# EAGLE board headstage-mech-test (EAGLE 6.5.0)

Size 39.62 x 39.62 mm. Coordinates in mm from the lower left corner, seen from the top.
Outline: circle at 19.81,19.81 radius 19.81
Copper layers (1*16): Top 0.0356mm / dielectric 1.5011mm / Bottom 0.0356mm
Design rules "ohs-park-2-layer": minimum track width 6mil, minimum drill 13mil, track to track 6mil, track to pad 6mil, pad to pad 6mil, via to via 6mil, smd to smd 6mil, copper to edge 15mil, drill to drill 6mil, minimum pad ring 7mil, minimum via ring 7mil, stop-mask expansion 4mil, vias tented up to drill 100mil, thermal gap 10mil
Net classes: 1 thick: width 0.102 mm
Holes 1.27 mm at 10.31,28.7 28.7,29.31 29.31,10.92 10.92,10.31

## Footprints (pad centres in the part's own frame; a part is rotated, then mirrored left to right if it is on the bottom)
DF40-70REC = smd 0.2 x 1.14: 1 -6.8,1.17; 2 -6.4,1.17; 3 -6,1.17; 4 -5.6,1.17; 5 -5.2,1.17; 6 -4.8,1.17; 7 -4.4,1.17; 8 -4,1.17; 9 -3.6,1.17; 10 -3.2,1.17; 11 -2.8,1.17; 12 -2.4,1.17; 13 -2,1.17; 14 -1.6,1.17; 15 -1.2,1.17; 16 -0.8,1.17; 17 -0.4,1.17; 18 0,1.17; 19 0.4,1.17; 20 0.8,1.17; 21 1.2,1.17; 22 1.6,1.17; 23 2,1.17; 24 2.4,1.17; 25 2.8,1.17; 26 3.2,1.17; 27 3.6,1.17; 28 4,1.17; 29 4.4,1.17; 30 4.8,1.17; 31 5.2,1.17; 32 5.6,1.17; 33 6,1.17; 34 6.4,1.17; 35 6.8,1.17; 36 6.8,-1.17; 37 6.4,-1.17; 38 6,-1.17; 39 5.6,-1.17; 40 5.2,-1.17; 41 4.8,-1.17; 42 4.4,-1.17; 43 4,-1.17; 44 3.6,-1.17; 45 3.2,-1.17; 46 2.8,-1.17; 47 2.4,-1.17; 48 2,-1.17; 49 1.6,-1.17; 50 1.2,-1.17; 51 0.8,-1.17; 52 0.4,-1.17; 53 0,-1.17; 54 -0.4,-1.17; 55 -0.8,-1.17; 56 -1.2,-1.17; 57 -1.6,-1.17; 58 -2,-1.17; 59 -2.4,-1.17; 60 -2.8,-1.17; 61 -3.2,-1.17; 62 -3.6,-1.17; 63 -4,-1.17; 64 -4.4,-1.17; 65 -4.8,-1.17; 66 -5.2,-1.17; 67 -5.6,-1.17; 68 -6,-1.17; 69 -6.4,-1.17; 70 -6.8,-1.17
DF40-70HEAD = smd 0.23 x 0.66: 1 -6.8,-1.685; 2 -6.4,-1.685; 3 -6,-1.685; 4 -5.6,-1.685; 5 -5.2,-1.685; 6 -4.8,-1.685; 7 -4.4,-1.685; 8 -4,-1.685; 9 -3.6,-1.685; 10 -3.2,-1.685; 11 -2.8,-1.685; 12 -2.4,-1.685; 13 -2,-1.685; 14 -1.6,-1.685; 15 -1.2,-1.685; 16 -0.8,-1.685; 17 -0.4,-1.685; 18 0,-1.685; 19 0.4,-1.685; 20 0.8,-1.685; 21 1.2,-1.685; 22 1.6,-1.685; 23 2,-1.685; 24 2.4,-1.685; 25 2.8,-1.685; 26 3.2,-1.685; 27 3.6,-1.685; 28 4,-1.685; 29 4.4,-1.685; 30 4.8,-1.685; 31 5.2,-1.685; 32 5.6,-1.685; 33 6,-1.685; 34 6.4,-1.685; 35 6.8,-1.685; 36 6.8,1.685; 37 6.4,1.685; 38 6,1.685; 39 5.6,1.685; 40 5.2,1.685; 41 4.8,1.685; 42 4.4,1.685; 43 4,1.685; 44 3.6,1.685; 45 3.2,1.685; 46 2.8,1.685; 47 2.4,1.685; 48 2,1.685; 49 1.6,1.685; 50 1.2,1.685; 51 0.8,1.685; 52 0.4,1.685; 53 0,1.685; 54 -0.4,1.685; 55 -0.8,1.685; 56 -1.2,1.685; 57 -1.6,1.685; 58 -2,1.685; 59 -2.4,1.685; 60 -2.8,1.685; 61 -3.2,1.685; 62 -3.6,1.685; 63 -4,1.685; 64 -4.4,1.685; 65 -4.8,1.685; 66 -5.2,1.685; 67 -5.6,1.685; 68 -6,1.685; 69 -6.4,1.685; 70 -6.8,1.685 | smd 0.35 x 0.66: M1 -7.275,-1.685; M2 7.275,-1.685; M3 7.275,1.685; M4 -7.275,1.685
0201 = smd 0.432 x 0.432: 1 -0.394,0; 2 0.394,0
0402 = smd 0.686 x 0.762: 1 -0.533,0; 2 0.533,0
DF40-20HEAD = smd 0.23 x 0.66: 1 -1.8,-1.685; 2 -1.4,-1.685; 3 -1,-1.685; 4 -0.6,-1.685; 5 -0.2,-1.685; 6 0.2,-1.685; 7 0.6,-1.685; 8 1,-1.685; 9 1.4,-1.685; 10 1.8,-1.685; 11 1.8,1.685; 12 1.4,1.685; 13 1,1.685; 14 0.6,1.685; 15 0.2,1.685; 16 -0.2,1.685; 17 -0.6,1.685; 18 -1,1.685; 19 -1.4,1.685; 20 -1.8,1.685 | smd 0.35 x 0.66: M1 -2.275,-1.685; M2 2.275,-1.685; M3 2.275,1.685; M4 -2.275,1.685
DF40-20REC = smd 0.2 x 1.14: 1 -1.8,1.17; 2 -1.4,1.17; 3 -1,1.17; 4 -0.6,1.17; 5 -0.2,1.17; 6 0.2,1.17; 7 0.6,1.17; 8 1,1.17; 9 1.4,1.17; 10 1.8,1.17; 11 1.8,-1.17; 12 1.4,-1.17; 13 1,-1.17; 14 0.6,-1.17; 15 0.2,-1.17; 16 -0.2,-1.17; 17 -0.6,-1.17; 18 -1,-1.17; 19 -1.4,-1.17; 20 -1.8,-1.17
RHD2164_COB_MECH = smd 7.722 x 4.674: CENTER 0,0
TESTPOINT_SMALL = drill 0.813 octagon: 1 0,0
OMNETICS_PZN-06-AA = smd 0.381 x 0.762: B1 0.635,-1.016; B2 0,-1.016; B3 -0.635,-1.016 | smd 0.381 x 1.016: T1 0.635,-2.159; T2 0,-2.159; T3 -0.635,-2.159
ADXL335 = smd 0.61 x 0.305: COM1 -1.775,-0.3; NC1 -1.775,1; NC2 -1.775,-0.95; NC3 1.775,-1; NC4 1.775,0.3; ST -1.775,0.35; XOUT 1.775,0.95; YOUT 1.775,-0.35 | smd 0.305 x 0.61: COM2 -1,-1.775; COM3 -0.35,-1.775; COM4 0.3,-1.775; NC5 1,1.775; NC6 -0.95,1.775; VS1 0.35,1.775; VS2 -0.3,1.775; ZOUT 0.95,-1.775
TSSOP-16 = smd 0.348 x 1.397: 1 -2.273,-2.814; 2 -1.623,-2.815; 3 -0.973,-2.815; 4 -0.323,-2.815; 5 0.327,-2.815; 6 0.977,-2.815; 7 1.627,-2.815; 8 2.277,-2.815; 9 2.277,2.825; 10 1.627,2.825; 11 0.977,2.825; 12 0.327,2.825; 13 -0.323,2.825; 14 -0.973,2.825; 15 -1.623,2.825; 16 -2.273,2.825

## Placement (x,y rotation side)
AIN_A  DF40REC  [DF40-70REC]  22.86,32.87 0 bottom
AIN_B  DF40REC  [DF40-70REC]  16.76,6.76 180 bottom
ATHRU_A_BOT  DF40REC  [DF40-70REC]  6.76,22.86 270 bottom
ATHRU_A_TOP  DF40HEAD  [DF40-70HEAD]  6.76,22.86 270 top
ATHRU_B_BOT  DF40REC  [DF40-70REC]  32.87,16.76 90 bottom
ATHRU_B_TOP  DF40HEAD  [DF40-70HEAD]  32.87,16.76 90 top
C1  10n  [0201]  14.02,21.13 0 bottom
C2  .1uF  [0402]  19.76,23.32 0 top
C3  .1uF  [0402]  22.35,26.57 270 top
C4  .1uF  [0402]  19.76,26.06 180 top
C5  .1uF  [0402]  19.76,24.69 180 top
C6  .1uF  [0402]  16,20.98 0 top
C7  10n  [0201]  26.67,18.59 180 bottom
C8  .1uF  [0402]  19.86,16.31 180 top
DIO  DF40HEAD  [DF40-20HEAD]  32.87,29.41 90 top
DTHRU_BOT  DF40REC  [DF40-20REC]  10.21,32.87 0 bottom
DTHRU_TOP  DF40HEAD  [DF40-20HEAD]  10.21,32.87 180 top
E$1  [RHD2164_COB_MECH]  17.02,25.04 0 bottom
E$2  [RHD2164_COB_MECH]  22.61,14.58 0 bottom
GND  GND  [TESTPOINT_SMALL]  36.83,27.18 0 top
GND.  GND  [TESTPOINT_SMALL]  2.79,12.45 0 top
MECH1  DF40HEAD  [DF40-70HEAD]  16.76,6.76 0 top
MECH2  DF40HEAD  [DF40-70HEAD]  22.86,32.87 180 top
MECH3  DF40HEAD  [DF40-20HEAD]  29.41,6.76 0 top
MECH4  DF40HEAD  [DF40-20HEAD]  6.76,10.21 270 top
PLT  PZN-06  [OMNETICS_PZN-06-AA]  2.13,19.2 0 top
R1  100  [0201]  22.91,21.95 0 top
R2  100  [0201]  25.15,21.95 0 top
R3  100  [0201]  27.18,21.95 0 top
R4  0  [0402]  12.09,11.63 180 bottom
R5  100k  [0201]  9.65,21.03 270 bottom
R6  100k  [0201]  10.62,21.03 270 bottom
R7  100k  [0201]  11.58,21.03 270 bottom
REF1  REF  [TESTPOINT_SMALL]  7.26,6.05 0 top
REF2  REF  [TESTPOINT_SMALL]  32.36,33.58 0 top
U1  ADXL335  [ADXL335]  15.95,24.69 0 top
U2  74HC4053  [TSSOP-16]  13.31,16.05 0 bottom
VCC1  VCC  [TESTPOINT_SMALL]  37.59,25.25 0 top
VCC2  VCC  [TESTPOINT_SMALL]  2.03,14.38 0 top

## Library data of the parts
AIN_A AIN_B ATHRU_A_BOT ATHRU_A_TOP ATHRU_B_BOT ATHRU_B_TOP C4-C6 DIO DTHRU_BOT DTHRU_TOP E$1 E$2 GND GND. MECH1-MECH4 PLT R1-R3 REF1 REF2 U1 U2 VCC1 VCC2 = jonnew
C1 C2 C7 C8 R4-R7 = RHD2000_eval_board
C3 = headstage

## Nets
AUXOUT_B: DIO.4
ELEC_TEST1: U2.14
ELEC_TEST2: U2.15
MISO1+: DIO.20
MISO1-: DIO.19
MISO2+: DIO.18
MISO2-: DIO.17
N$1 [thick]: C7.1
N$2: AIN_A.38
N$3: AIN_A.39
N$4: AIN_A.40
N$5: AIN_A.41
N$6: AIN_A.42
N$7: AIN_A.32
N$8: AIN_A.31
N$9: AIN_A.30
N$10: AIN_A.29
N$11: AIN_B.38
N$12: AIN_A.28
N$13: AIN_A.27
N$14: AIN_A.26
N$15: AIN_A.25
N$16: AIN_A.24
N$17: AIN_A.23
N$18: AIN_A.22
N$19: AIN_A.21
N$20: AIN_A.20
N$21: AIN_A.19
N$22: AIN_A.18
N$23: AIN_A.17
N$24: AIN_A.16
N$25: AIN_A.15
N$26: AIN_A.14
N$27: AIN_A.13
N$28: AIN_A.12
N$29: AIN_A.11
N$30: AIN_A.10
N$31: AIN_A.9
N$32: AIN_A.8
N$33: AIN_A.7
N$34: AIN_A.6
N$35: AIN_B.39
N$36: AIN_B.40
N$37: AIN_B.41
N$38: AIN_B.42
N$39: AIN_B.43
N$40: AIN_B.44
N$41: AIN_A.5
N$42 [thick]: C1.1
N$43: AIN_A.4
N$44: AIN_A.3
N$45: AIN_A.2
N$46: AIN_A.33
N$47: AIN_B.45
N$48: AIN_B.46
N$49: AIN_B.47
N$50: AIN_B.48
N$51: AIN_B.49
N$52: AIN_B.50
N$53: AIN_B.51
N$54: AIN_B.52
N$55: AIN_B.53
N$56: AIN_B.54
N$57: AIN_B.55
N$58: AIN_B.56
N$59: AIN_B.57
N$60: AIN_B.58
N$61: AIN_B.59
N$62: AIN_B.60
N$63: AIN_B.61
N$64: AIN_B.62
N$65: AIN_B.63
N$66: AIN_B.64
N$67: AIN_B.65
N$68: AIN_B.66
N$69: AIN_B.67
N$70: AIN_A.43
N$71: AIN_A.44
N$72: AIN_A.45
N$73: AIN_A.46
N$74: AIN_B.68
N$75: AIN_B.37
N$76: AIN_B.32
N$77: AIN_B.31
N$78: AIN_B.30
N$79: AIN_B.29
N$80: AIN_B.28
N$81: AIN_B.27
N$82: AIN_B.26
N$83: AIN_B.25
N$84: AIN_B.24
N$85: AIN_B.23
N$86: AIN_B.22
N$87: AIN_B.21
N$88: AIN_B.20
N$89: AIN_B.19
N$90: AIN_B.18
N$91: AIN_B.17
N$92: AIN_B.16
N$93: AIN_B.15
N$94: AIN_B.14
N$95: AIN_B.13
N$96: AIN_B.12
N$97: AIN_B.11
N$98: AIN_B.10
N$99: AIN_B.9
N$100: AIN_B.8
N$101: AIN_B.7
N$102: AIN_B.6
N$103: AIN_B.5
N$104: AIN_B.4
N$105: AIN_B.3
N$106: AIN_B.2
N$107: AIN_B.33
N$137: AIN_A.47
N$138: AIN_A.48
N$139: AIN_A.49
N$140: AIN_A.50
N$141: AIN_A.51
N$142: AIN_A.52
N$143: AIN_A.53
N$144: AIN_A.54
N$145: AIN_A.55
N$146: AIN_A.56
N$147: AIN_A.57
N$148: AIN_A.58
N$149: AIN_A.59
N$150: AIN_A.60
N$151: AIN_A.61
N$152: AIN_A.62
N$153: AIN_A.63
N$154: AIN_A.64
N$155: AIN_A.65
N$156: AIN_A.66
N$162: AIN_A.37
N$450: AIN_A.68
N$451: AIN_A.67
S$7 [thick]: U2.8
S$11 [thick]: U2.16

## Text on the board
tPlace: 128 Channel / Headstage Module | Rev. 1.0 / CC BY-SA-NC-4.0 / JPN, MWL@MIT / 2015-01